# Altium PCB template.PcbDoc
Units mm, origin at the board's own origin, x right, y up, seen from the top; angles counter-clockwise.
Board outline 35.56 x 16.51 mm, 2 copper layers (Top, Bottom); 80 components, 60 nets, 282 pads, 2 vias.
Unrouted connection lines stored in the file: 142.
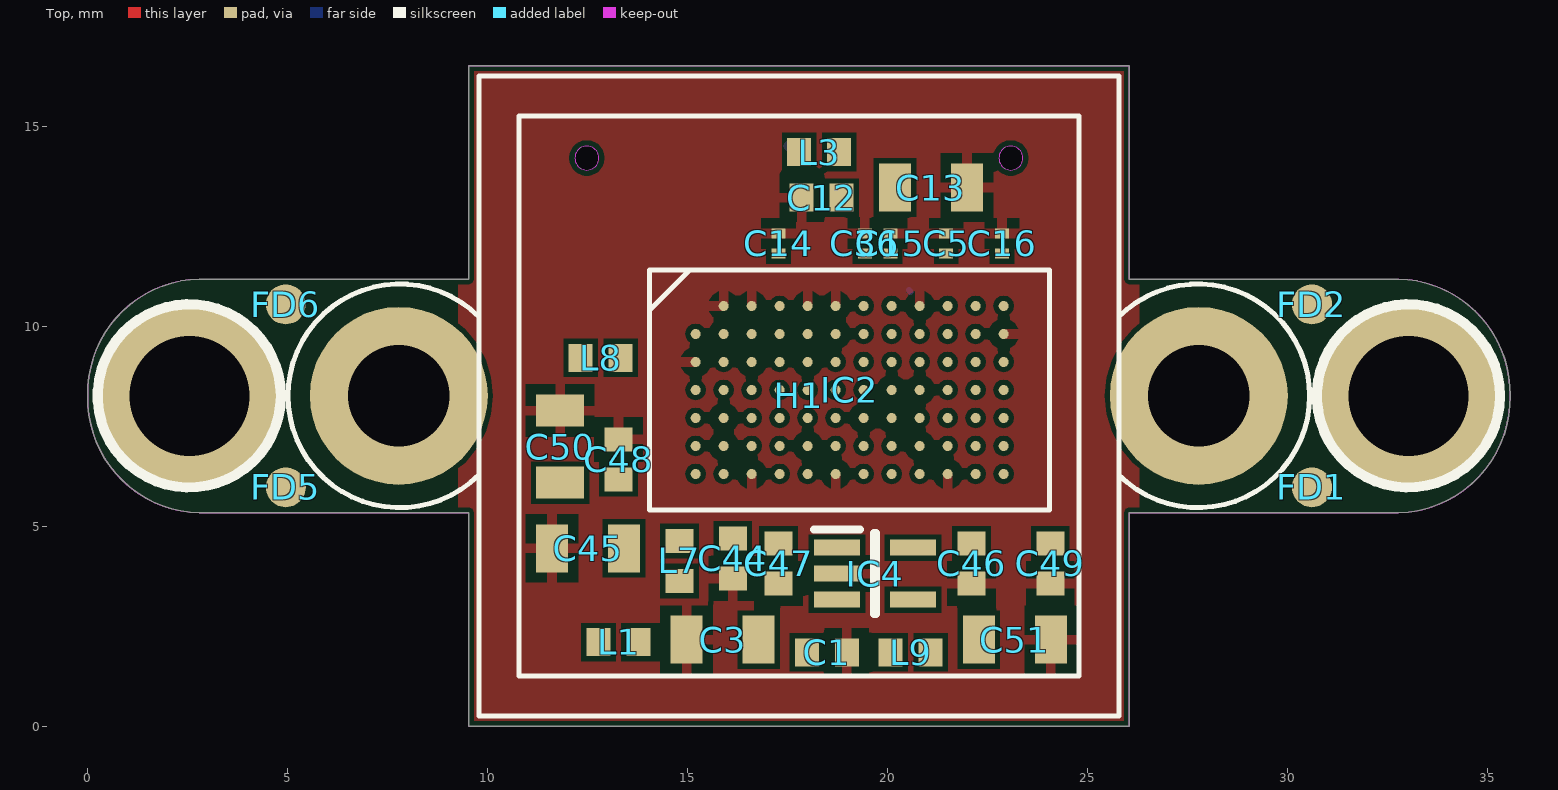
[diagram p0: Top view]
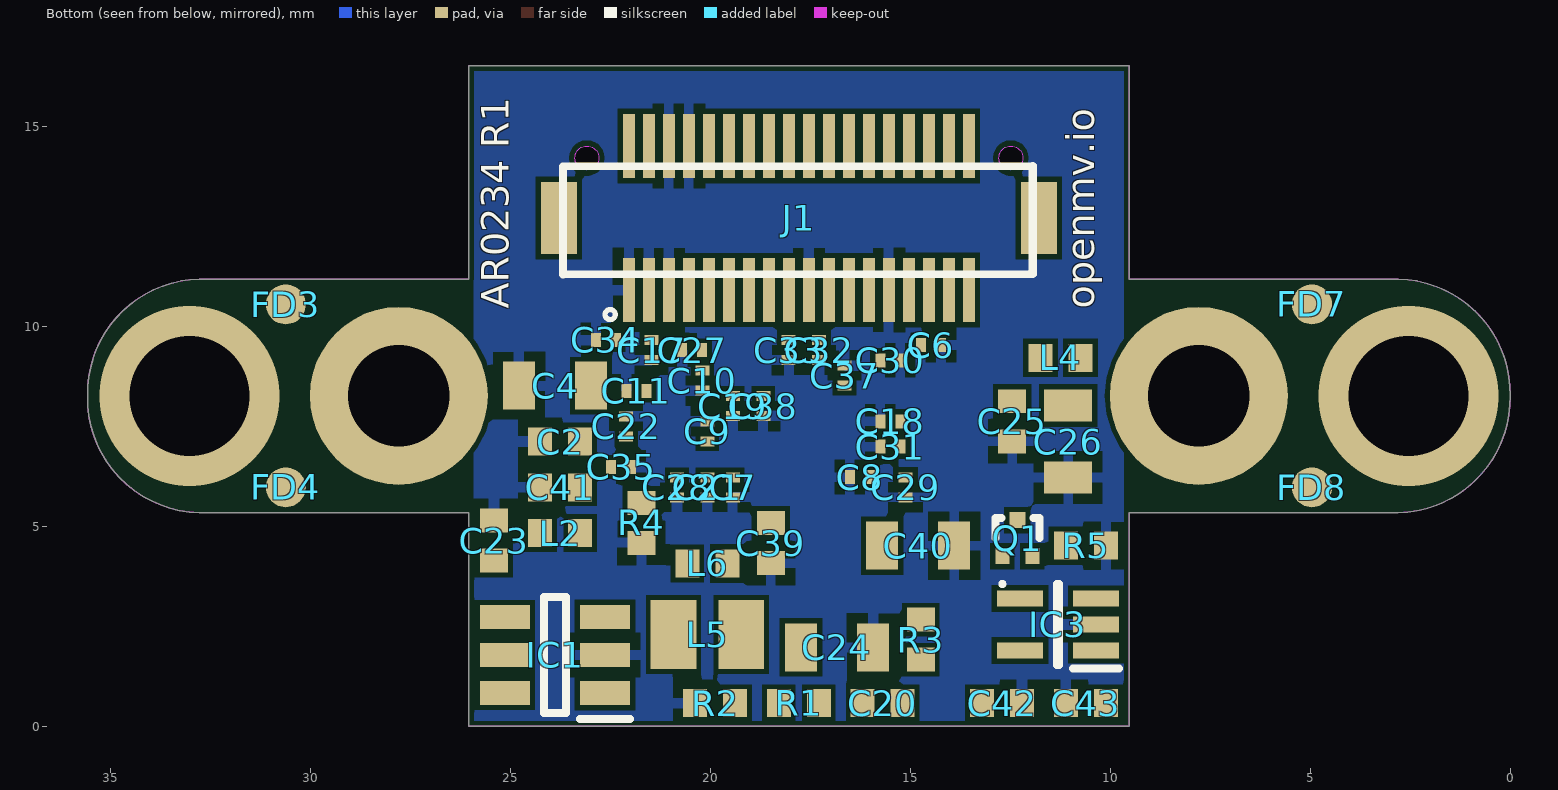
[diagram p1: Bottom view, seen from below]

## Layer stack, top to bottom
Top Solder: solder mask 0.0102, Solder Resist, Dk 3.5
Top: signal copper 0.035
Dielectric 1: dielectric 0.32, FR-4, Dk 4.8
Bottom: signal copper 0.035
Bottom Solder: solder mask 0.0102, Solder Resist, Dk 3.5

## Board outline
32.767,5.334 26.036,5.334 26.036,0 9.526,0 9.526,5.334 2.795,5.334 cw(c2.858,8.191) 0.001,8.255 cw(c2.858,8.319) 2.795,11.176 9.526,11.176 9.526,16.51 26.036,16.51 26.036,11.176 32.767,11.176 cw(c32.703,8.319) 35.561,8.255 cw(c32.703,8.191)
cut-out: 12.481,13.9 ccw(c12.481,14.2) 12.781,14.2 ccw(c12.481,14.2) 12.481,14.5 ccw(c12.481,14.2) 12.181,14.2 ccw(c12.481,14.2)
cut-out: 23.081,13.9 ccw(c23.081,14.2) 23.381,14.2 ccw(c23.081,14.2) 23.081,14.5 ccw(c23.081,14.2) 22.781,14.2 ccw(c23.081,14.2)

## Design rules (kind name [scope] priority, off if disabled: settings)
BoardOutlineClearance mdCopperDimension [All] p1: gap=0.254 ignorepadtopadclearanceinfootprint=FALSE except(0: Arc-SplitContinuation Track-SplitContinuation SMDPad-SplitContinuation THPad-SplitContinuation Via-SplitContinuation Fill-SplitContinuation Poly-SplitContinuation Region-SplitContinuation Text-SplitContinuation; 0.076: Poly-OutlineEdge Poly-CavityEdge Poly-CutoutEdge Poly-SplitBarrior)
Clearance Clearance_for_PolygonClass_Isolate_5 [InPolygonClass('Isolate_5') vs IsArc Or IsTrack Or IsPad Or IsVia Or IsFill Or IsRegion Or IsText] p1: gap=0.127 ignorepadtopadclearanceinfootprint=FALSE
Clearance "Clearance (Same Net)" [All] p2: gap=0.076 ignorepadtopadclearanceinfootprint=FALSE
Clearance Clearance_for_NetClass_signal [InNetClass('signal') vs InNetClass('signal')] p3: gap=0.127 ignorepadtopadclearanceinfootprint=FALSE
Clearance Clearance_for_NetClass_signal_And_pwr [InNetClass('signal') vs InNetClass('pwr')] p4: gap=0.076 ignorepadtopadclearanceinfootprint=FALSE
Clearance Clearance_for_NetClass_signal_And_gnd [InNetClass('signal') vs InNetClass('gnd')] p5: gap=0.076 ignorepadtopadclearanceinfootprint=FALSE
Clearance Clearance_for_NetClass_signal_And_default [InNetClass('signal') vs IsArc Or IsTrack Or IsPad Or IsVia Or IsFill Or IsRegion Or IsText] p6: gap=0.076 ignorepadtopadclearanceinfootprint=FALSE
Clearance Clearance_for_NetClass_pwr [InNetClass('pwr') vs InNetClass('pwr')] p7: gap=0.127 ignorepadtopadclearanceinfootprint=FALSE
Clearance Clearance_for_NetClass_pwr_And_gnd [InNetClass('pwr') vs InNetClass('gnd')] p8: gap=0.076 ignorepadtopadclearanceinfootprint=FALSE
Clearance Clearance_for_NetClass_pwr_And_default [InNetClass('pwr') vs IsArc Or IsTrack Or IsPad Or IsVia Or IsFill Or IsRegion Or IsText] p9: gap=0.076 ignorepadtopadclearanceinfootprint=FALSE
Clearance Clearance_for_NetClass_gnd [InNetClass('gnd') vs InNetClass('gnd')] p10: gap=0.127 ignorepadtopadclearanceinfootprint=FALSE
Clearance Clearance_for_NetClass_gnd_And_default [InNetClass('gnd') vs IsArc Or IsTrack Or IsPad Or IsVia Or IsFill Or IsRegion Or IsText] p11: gap=0.076 ignorepadtopadclearanceinfootprint=FALSE
Clearance [All] p12: gap=0.076 ignorepadtopadclearanceinfootprint=FALSE
HoleSize HoleSize_For_NetClass_signal [InNetClass('signal')] p1: absolutevalues=TRUE maxlimit=0.102 minlimit=0.102 maxpercent=80.000 minpercent=20.000
HoleSize HoleSize_For_NetClass_pwr [InNetClass('pwr')] p2: absolutevalues=TRUE maxlimit=0.102 minlimit=0.102 maxpercent=80.000 minpercent=20.000
HoleSize HoleSize_For_NetClass_gnd [InNetClass('gnd')] p3: absolutevalues=TRUE maxlimit=0.102 minlimit=0.102 maxpercent=80.000 minpercent=20.000
HoleSize [All] p4: absolutevalues=TRUE maxlimit=2540 minlimit=0.102 maxpercent=80.000 minpercent=20.000
HoleToHoleClearance mdDrill [All] p1: gap=0.076 allowstackedmicrovias=TRUE
MinimumSolderMaskSliver [All] p1 off: minsoldermaskwidth=0.254
PasteMaskExpansion Expansion_SMDPaste_OFF [InPadClass('SMDPaste_OFF')] p1: expansion=0
PasteMaskExpansion mlMinCreamFrame [All] p2: expansion=0
PolygonConnect PolygonConnect_For_PolygonThermal_ON_Width100000_Gap100000 [InPolygonClass('PolygonThermal_ON_Width100000_Gap100000') vs Not IsVia] p1: connectstyle=Relief reliefconductorwidth=0.254 reliefentries=4 polygonreliefangle="90 Angle" airgapwidth=0.254
PolygonConnect ThermalVias [IsVia] p2: connectstyle=Direct reliefconductorwidth=0.254 reliefentries=4 polygonreliefangle="90 Angle" airgapwidth=0.254
PolygonConnect [All] p3: connectstyle=Relief reliefconductorwidth=0.254 reliefentries=4 polygonreliefangle="90 Angle" airgapwidth=0.254
RoutingVias [All] p1: holewidth=0.102 width=0.254 viastyle="Through Hole" minholewidth=0.102 minwidth=0.254 maxholewidth=2.54 maxwidth=2.54
SolderMaskExpansion mlMinStopFrame [All] p1: expansion=0.051 istentingtop=FALSE
Width Width_For_NetClass_signal [InNetClass('signal')] p1: maxlimit=0.254 minlimit=0.076 preferedwidth=0.076
Width Width_For_NetClass_pwr [InNetClass('pwr')] p2: maxlimit=0.254 minlimit=0.076 preferedwidth=0.076
Width Width_For_NetClass_gnd [InNetClass('gnd')] p3: maxlimit=0.254 minlimit=0.076 preferedwidth=0.076
Width [All] p4: maxlimit=0.254 minlimit=0.076 preferedwidth=0.076
26 further rules are at their usual default settings.

## Classes and differential pairs
polygon class PolygonThermal_ON_Width100000_Gap100000: Polygon_2_Net_GND Polygon_3_Net_GND
polygon class Isolate_5: Polygon_2_Net_GND Polygon_3_Net_GND
pad class SMDPaste_OFF: FD1-1 FD2-1 FD3-1 FD4-1 FD5-1 FD6-1 FD7-1 FD8-1 J1-1 J1-2 J1-3 J1-4 J1-5 J1-6 J1-7 J1-8 J1-9 J1-10 J1-11 J1-12 J1-13 J1-14 J1-15 J1-16 J1-17 J1-18 J1-19 J1-20 J1-21 J1-22 J1-23 J1-24 J1-25 J1-26 J1-27 J1-28 J1-29 J1-30 J1-31 J1-32 J1-33 J1-34 J1-35 J1-36
net class signal: DCMI_CLK DCMI_D0 DCMI_D1 DCMI_D2 DCMI_D3 DCMI_D4 DCMI_D5 DCMI_D6 DCMI_D7 DCMI_D8 DCMI_D9 DCMI_FSIN DCMI_HSYNC DCMI_PCLK DCMI_PWDN DCMI_PWDN_INT DCMI_RST DCMI_SCL DCMI_SDA DCMI_VSYNC RESET_N SPI_MISO SPI_MOSI SPI_SCLK SPI_SSEL
net class pwr: CAP FB RSVD SW VAA VAA_PHY VAA_PIX VCC VDD VDD_DATA VDD_PHY VDD_REG VDDA VDDIO VDDIO_PHY VDDIO_PHY_REG VDDIO_REG
net class gnd: GND

## Components (designator, comment, footprint, x,y, rotation, side; value= is the part's Value field where it differs from the comment)
C1 "4.7uF" 0402 18.479,1.841 r180 top
C2 "4.7uF" 0402 23.75,7.112 r180 bottom
C3 "22uF" 0805 15.876,2.159 r0 top
C4 "22uF" 0805 23.877,8.509 r180 bottom
C5 "0.22uF" C0201 21.464,12.065 r90 top
C6 "0.22uF" C0201 14.479,9.525 r180 bottom
C7 "0.22uF" C0201 19.432,5.969 r270 bottom
C8 "0.22uF" C0201 16.257,6.223 r0 bottom
C9 "0.22uF" C0201 20.067,7.366 r90 bottom
C10 "0.22uF" C0201 20.194,8.636 r270 bottom
C11 "0.22uF" C0201 21.845,8.382 r0 bottom
C12 "4.7uF" 0402 18.352,13.208 r0 top
C13 "22uF" 0805 21.083,13.462 r180 top
C14 "0.22uF" C0201 17.273,12.065 r90 top
C15 "0.22uF" C0201 20.067,12.065 r90 top
C16 "0.22uF" C0201 22.861,12.065 r90 top
C17 "0.22uF" C0201 21.464,9.398 r270 bottom
C18 "0.22uF" C0201 15.495,7.62 r0 bottom
C19 "0.22uF" C0201 19.432,8.001 r270 bottom
C20 "6.8pF" 0402 15.685,0.572 r180 bottom
C21 "0.22uF" C0201 20.067,5.969 r270 bottom
C22 "0.22uF" C0201 22.099,7.493 r90 bottom
C23 "4.7uF" 0402 25.401,4.635 r270 bottom
C24 "22uF" 0805 16.828,1.968 r0 bottom
C25 "4.7uF" 0402 12.447,7.62 r90 bottom
C26 "22uF" 0805 11.05,7.112 r90 bottom
C27 "0.22uF" C0201 20.448,9.398 r0 bottom
C28 "0.22uF" C0201 20.829,5.969 r270 bottom
C29 "0.22uF" C0201 15.114,5.969 r270 bottom
C30 "0.22uF" C0201 15.495,9.144 r180 bottom
C31 "0.22uF" C0201 15.495,6.985 r0 bottom
C32 "0.22uF" C0201 17.273,9.398 r270 bottom
C33 "0.22uF" C0201 18.035,9.398 r270 bottom
C34 "0.22uF" C0201 22.607,9.652 r0 bottom
C35 "0.22uF" C0201 22.226,6.477 r180 bottom
C36 "0.22uF" C0201 19.432,12.065 r90 top
C37 "0.22uF" C0201 16.638,8.763 r90 bottom
C38 "0.22uF" C0201 18.67,8.001 r270 bottom
C39 "4.7uF" 0402 18.479,4.572 r90 bottom
C40 "22uF" 0805 14.796,4.508 r0 bottom
C41 "4.7uF" 0402 23.75,5.969 r180 bottom
C42 "4.7uF" 0402 12.701,0.572 r0 bottom
C43 "4.7uF" 0402 10.605,0.572 r180 bottom
C44 "4.7uF" 0402 16.13,4.191 r90 top
C45 "22uF" 0805 12.51,4.445 r0 top
C46 "4.7uF" 0402 22.099,4.064 r90 top
C47 "4.7uF" 0402 17.273,4.064 r90 top
C48 "4.7uF" 0402 13.272,6.667 r270 top
C49 "4.7uF" 0402 24.067,4.064 r90 top
C50 "22uF" 0805 11.812,6.985 r270 top
C51 "22uF" 0805 23.178,2.159 r180 top
FD1 "" FIDUCIAL-1X2 30.608,5.969 r0 top
FD2 "" FIDUCIAL-1X2 30.608,10.541 r0 top
FD3 "" FIDUCIAL-1X2 30.608,10.541 r180 bottom
FD4 "" FIDUCIAL-1X2 30.608,5.969 r180 bottom
FD5 "" FIDUCIAL-1X2 4.954,5.969 r0 top
FD6 "" FIDUCIAL-1X2 4.954,10.541 r0 top
FD7 "" FIDUCIAL-1X2 4.954,10.541 r180 bottom
FD8 "" FIDUCIAL-1X2 4.954,5.969 r180 bottom
H1 "" LENSMOUNT-20MM 17.781,8.255 r0 top
IC1 "TLV62568PDDCR" SOT95P280X110-6N 23.877,1.778 r0 bottom
IC2 "AR0234CSSC00SUKA0" AR0234CSSC00SUKA0 19.052,8.403 r0 top
IC3 "MIC5365-2.8YC5-TR" SOT65P210X110-5N 11.304,2.54 r0 bottom
IC4 "MIC5365-2.8YC5-TR" SOT65P210X110-5N 19.686,3.81 r0 top
J1 "" DF12-36-DP 17.781,12.7 r180 bottom
L1 "100" 0402 13.272,2.095 r180 top
L2 "100" 0402 23.75,4.826 r0 bottom
L3 "100" 0402 18.289,14.351 r180 top
L4 "100" 0402 11.24,9.207 r0 bottom
L5 "MAKK2016T2R2M" INDC2016X100N 20.067,2.286 r0 bottom
L6 "100" 0402 20.067,4.064 r0 bottom
L7 "100" 0402 14.796,4.127 r270 top
L8 "100" 0402 12.828,9.207 r180 top
L9 "100" 0402 20.575,1.841 r180 top
Q1 "PMXB120EPEZ" PMXB120EPEZ 12.32,4.699 r180 bottom
R1 "100K" R0402 17.781,0.572 r180 bottom
R2 "100K" R0402 19.876,0.572 r0 bottom
R3 "10K" R0402 14.733,2.159 r90 bottom
R4 "1.5K" R0402 21.718,5.08 r90 bottom
R5 "100K" R0402 10.605,4.508 r180 bottom

## Footprints (in the part's own frame and the unit in brackets; to place one, negate y for a bottom-side part, rotate by r counter-clockwise, add the part's x,y. Pads: shape width x height; smd on the part's side, far side on the other; paste and mask are expansions set on the pad)
0402 [mm] "0402"
  rect 0.6x0.7 smd: 1(-0.5,0) 2(0.5,0)
0805 [mil] "0805"
  rect 31.5x47.24 smd: 1(-35.43,0) 2(35.43,0)
AR0234CSSC00SUKA0 [mm] "AR0234CSSC00SUKA0"
  rrect100% 0.25x0.25 smd: P$1(-3.15,2.1) P$2(-2.45,2.1) P$3(-1.75,2.1) P$4(-1.05,2.1) P$5(-0.35,2.1) P$6(0.35,2.1) P$7(1.05,2.1) P$8(1.75,2.1) P$9(2.45,2.1) P$10(3.15,2.1) P$11(3.85,2.1) P$12(-3.85,1.4) P$13(-3.15,1.4) P$14(-2.45,1.4) P$15(-1.75,1.4) P$16(-1.05,1.4) P$17(-0.35,1.4) P$18(0.35,1.4) P$19(1.05,1.4) P$20(1.75,1.4) P$21(2.45,1.4) P$22(3.15,1.4) P$23(3.85,1.4) P$24(-3.85,0.7) P$25(-3.15,0.7) P$26(-2.45,0.7) P$27(-1.75,0.7) P$28(-1.05,0.7) P$29(-0.35,0.7) P$30(0.35,0.7) P$31(1.05,0.7) P$32(1.75,0.7) P$33(2.45,0.7) P$34(3.15,0.7) P$35(3.85,0.7) P$36(-3.85,0) P$37(-3.15,0) P$38(-2.45,0) P$39(-1.75,0) P$40(-1.05,0) P$41(-0.35,0) P$42(0.35,0) P$43(1.05,0) P$44(1.75,0) P$45(2.45,0) P$46(3.15,0) P$47(3.85,0) P$48(-3.85,-0.7) P$49(-3.15,-0.7) P$50(-2.45,-0.7) P$51(-1.75,-0.7) P$52(-1.05,-0.7) P$53(-0.35,-0.7) P$54(0.35,-0.7) P$55(1.05,-0.7) P$56(1.75,-0.7) P$57(2.45,-0.7) P$58(3.15,-0.7) P$59(3.85,-0.7) P$60(-3.85,-1.4) P$61(-3.15,-1.4) P$62(-2.45,-1.4) P$63(-1.75,-1.4) P$64(-1.05,-1.4) P$65(-0.35,-1.4) P$66(0.35,-1.4) P$67(1.05,-1.4) P$68(1.75,-1.4) P$69(2.45,-1.4) P$70(3.15,-1.4) P$71(3.85,-1.4) P$72(-3.85,-2.1) P$73(-3.15,-2.1) P$74(-2.45,-2.1) P$75(-1.75,-2.1) P$76(-1.05,-2.1) P$77(-0.35,-2.1) P$78(0.35,-2.1) P$79(1.05,-2.1) P$80(1.75,-2.1) P$81(2.45,-2.1) P$82(3.15,-2.1) P$83(3.85,-2.1)
  silkscreen extent -5,-3 5,3
C0201 [mm] "C0201"
  rect 0.25x0.35 smd: 1(-0.25,0) 2(0.25,0)
DF12-36-DP [mm] "DF12-36-DP"
  rect 0.3x1.6 smd paste+0: 1(-4.25,-1.8) 2(-4.25,1.8) 3(-3.75,-1.8) 4(-3.75,1.8) 5(-3.25,-1.8) 6(-3.25,1.8) 7(-2.75,-1.8) 8(-2.75,1.8) 9(-2.25,-1.8) 10(-2.25,1.8) 11(-1.75,-1.8) 12(-1.75,1.8) 13(-1.25,-1.8) 14(-1.25,1.8) 15(-0.75,-1.8) 16(-0.75,1.8) 17(-0.25,-1.8) 18(-0.25,1.8) 19(0.25,-1.8) 20(0.25,1.8) 21(0.75,-1.8) 22(0.75,1.8) 23(1.25,-1.8) 24(1.25,1.8) 25(1.75,-1.8) 26(1.75,1.8) 27(2.25,-1.8) 28(2.25,1.8) 29(2.75,-1.8) 30(2.75,1.8) 31(3.25,-1.8) 32(3.25,1.8) 33(3.75,-1.8) 34(3.75,1.8) 35(4.25,-1.8) 36(4.25,1.8)
  rect 0.9x1.8 smd: F1(-6,0) F2(6,0)
  silkscreen extent -5.89,-2.54 5.85,1.3
FIDUCIAL-1X2 [mm] "FIDUCIAL-1X2"
  rrect100% 1x1 smd paste+0: 1(0,0)
INDC2016X100N [mm] "INDC2016X100N"
  rect 1.14x1.73 smd: 1(-0.847,0) 2(0.847,0)
LENSMOUNT-20MM [mm] "LENSMOUNT-20MM"
  round 4.445 hole 2.54: P$1(-10,0) P$2(10,0)
  silkscreen extent -12.77,-8 12.77,8
PMXB120EPEZ [mm] "PMXB120EPEZ"
  rect 0.35x0.4 smd: 1(-0.375,-0.45) 2(0.375,-0.45)
  rect 0.4x0.4 smd: 3(0,0.45)
  silkscreen extent -0.55,-1.2 0.55,0.5
R0402 [mm] "R0402"
  rect 0.6x0.7 smd: 1(-0.5,0) 2(0.5,0)
SOT65P210X110-5N [mm] "SOT65P210X110-5N"
  rect 1.15x0.4 smd: 1(-0.95,0.65) 2(-0.95,0) 3(-0.95,-0.65) 4(0.95,-0.65) 5(0.95,0.65)
  silkscreen extent -1.53,-1.01 0.02,1.1
SOT95P280X110-6N [mm] "SOT95P280X110-6N"
  rect 1.25x0.6 smd: 1(-1.25,0.95) 2(-1.25,0) 3(-1.25,-0.95) 4(1.25,-0.95) 5(1.25,0) 6(1.25,0.95)
  silkscreen extent -1.88,-1.45 0.28,1.6

## Part data
C1 C2 C12 C20 C23 C25 C39 C41 C42 C43 C44 C46 C47 C48 C49 L1 L2 L3 L4 L6 L7 L8 L9: library part 0402, PackageName=0402
C3 C4 C13 C24 C26 C40 C45 C50 C51: library part 0805, PackageName=0805
C5 C6 C7 C8 C9 C10 C11 C14 C15 C16 C17 C18 C19 C21 C22 C27 C28 C29 C30 C31 C32 C33 C34 C35 C36 C37 C38: library part C0201, PackageName=C0201
FD1 FD2 FD3 FD4 FD5 FD6 FD7 FD8: library part FIDUCIAL-1X2, PackageName=FIDUCIAL-1X2
H1: library part LENSMOUNT-20MM, PackageName=LENSMOUNT-20MM
IC1: library part SOT95P280X110-6N, PackageName=SOT95P280X110-6N
IC3 IC4: library part SOT65P210X110-5N, PackageName=SOT65P210X110-5N
J1: library part DF12-36-DP, PackageName=DF12-36-DP
L5: library part INDC2016X100N, PackageName=INDC2016X100N
R1 R2 R3 R4 R5: library part R0402, PackageName=R0402
IC2: PackageName=AR0234CSSC00SUKA0
Q1: PackageName=PMXB120EPEZ

## Free pads (board coordinates)
  round 0.6 hole 0.6 unplated: MH1(23.081,14.2) MH2(12.481,14.2)

## Via types
v1: diameter 4.5/4.5 (per signal layer), hole 3, Top to Bottom, 2 vias

## Nets (pads, with @x,y where several pads share a name; then routed paths per layer and width w, separated by ;. In a path a pad name is that pad's centre, name@x,y a point inside that pad or via, vN(x,y) a via of type N, cw(c..) or ccw(c..) an arc to the next point about the centre after c; other vN are vias at no path point)
CAP: C41.2 IC2.P$71
DCMI_CLK: IC2.P$82 J1.12
DCMI_D0: IC2.P$62 J1.9
DCMI_D1: IC2.P$75 J1.7 | length 0.1
  Bottom w0.152: J1.7 J1.7@20.575,10.856
DCMI_D2: IC2.P$76 J1.31
DCMI_D3: IC2.P$50 J1.29
DCMI_D4: IC2.P$36 J1.35
DCMI_D5: IC2.P$37 J1.28
DCMI_D6: IC2.P$14 J1.26
DCMI_D7: IC2.P$51 J1.33
DCMI_D8: IC2.P$39 J1.24
DCMI_D9: IC2.P$27 J1.22
DCMI_FSIN: IC2.P$40 J1.23
DCMI_HSYNC: IC2.P$30 J1.18
DCMI_PCLK: IC2.P$29 J1.14
DCMI_PWDN: J1.25 Q1.1
DCMI_PWDN_INT: IC3.3 Q1.3 R5.1
DCMI_RST: J1.21 R3.2
DCMI_SCL: IC2.P$65 J1.32
DCMI_SDA: IC2.P$53 J1.34
DCMI_VSYNC: IC2.P$18 J1.16
FB: C20.2 IC1.6 R1.1 R2.1
GND: C1.1 C2.1 C3.1 C4.1 C5.2 C6.2 C7.2 C8.2 C9.2 C10.2 C11.2 C12.1 C13.1 C14.2 C15.2 C16.2 C17.2 C18.2 C19.2 C21.2 C22.2 C23.1 C24.1 C25.1 C26.1 C27.2 C28.2 C29.2 C30.2 C31.2 C32.2 C33.2 C34.2 C35.2 C36.2 C37.2 C38.2 C39.1 C40.1 C41.1 C42.1 C43.1 C44.1 C45.1 C46.1 C47.1 C48.1 C49.1 C50.1 C51.1 IC1.2 IC2.P$1 IC2.P$2 IC2.P$4 IC2.P$5 IC2.P$8 IC2.P$13 IC2.P$17 IC2.P$23 IC2.P$24 IC2.P$26 IC2.P$28 IC2.P$43 IC2.P$44 IC2.P$49 IC2.P$54 IC2.P$55 IC2.P$61 IC2.P$64 IC2.P$68 IC2.P$74 IC2.P$77 IC2.P$81 IC3.2 IC4.2 J1.1 J1.3 J1.5 J1.6 J1.8 J1.19 J1.27 R2.2 R4.1 R5.2
N$3: 
  other v1: 2.541,8.255
N$4: 
  other v1: 33.021,8.255
N$57: 
N$64: 
N$65: 
N$66: 
N$67: 
N$68: 
N$69: 
N$70: 
N$71: 
N$72: 
N$73: 
N$74: 
N$75: 
N$76: 
N$77: 
RESET_N: IC1.5 IC2.P$66 R3.1
RSVD: IC2.P$69 R4.2
SPI_MISO: IC2.P$52 J1.15
SPI_MOSI: J1.17
SPI_SCLK: J1.13
SPI_SSEL: J1.11
SW: IC1.3 L5.2
VAA: C5.1 C6.1 C7.1 C8.1 C44.2 C45.2 IC2.P$9 IC2.P$12 IC2.P$73 IC2.P$78 L7.1
VAA_PHY: C9.1 C39.2 C40.2 IC2.P$67 L6.1
VAA_PIX: C27.1 C28.1 C29.1 C30.1 C48.2 C50.2 IC2.P$19 IC2.P$25 IC2.P$72 IC2.P$80 L8.1
VCC: C23.2 IC1.4 J1.2 J1.10 J1.20 J1.30 J1.36 | length 0
  Bottom w0.254: J1.20@17.527,14.504 J1.20
VDD: C1.2 C3.2 C14.1 C15.1 C16.1 C17.1 C18.1 C19.1 C21.1 IC2.P$3 IC2.P$7 IC2.P$11 IC2.P$21 IC2.P$42 IC2.P$48 IC2.P$79 L1.1
VDD_DATA: C2.2 C4.2 C22.1 IC2.P$70 L2.1
VDD_PHY: C10.1 C12.2 C13.2 IC2.P$31 L3.1
VDD_REG: C20.1 C24.2 L1.2 L2.2 L3.2 L5.1 R1.2
VDDA: C43.2 C47.2 IC3.1 IC4.1 J1.4 Q1.2
VDDIO: C31.1 C32.1 C33.1 C34.1 C35.1 C36.1 C37.1 C38.1 C49.2 C51.2 IC2.P$6 IC2.P$15 IC2.P$16 IC2.P$22 IC2.P$38 IC2.P$41 IC2.P$60 IC2.P$83 L9.1
VDDIO_PHY: C11.1 C25.2 C26.2 IC2.P$45 L4.1
VDDIO_PHY_REG: C46.2 IC1.1 IC4.5 L4.2
VDDIO_REG: C42.2 IC3.5 IC4.3 L6.2 L7.2 L8.2 L9.2
pads on no net: FD1.1 FD2.1 FD3.1 FD4.1 FD5.1 FD6.1 FD7.1 FD8.1 H1.P$1 H1.P$2 IC2.P$10 IC2.P$20 IC2.P$32 IC2.P$33 IC2.P$34 IC2.P$35 IC2.P$46 IC2.P$47 IC2.P$56 IC2.P$57 IC2.P$58 IC2.P$59 IC2.P$63 IC3.4 IC4.4 J1.F1 J1.F2

## Polygon pours and split planes (outlines as drawn)
GND on Top "Polygon_2_Net_GND" (solid, remove dead copper, pour order 1): 9.272,-0.254 9.272,16.764 26.29,16.764 26.29,-0.254
GND on Bottom "Polygon_3_Net_GND" (solid, remove dead copper, pour order 0): 9.653,0.127 9.653,16.383 25.909,16.383 25.909,0.127

## Keep-outs
Keep-Out Layer:
  the board outline again, w0

## Silkscreen, mask and mechanical layers (free items; w line width, h text height)
Top Overlay:
  circle w0.254: c2.541,8.255 r2.29
  circle w0.254: c33.021,8.255 r2.29
Bottom Overlay:
  text "openmv.io" at 10.399,10.437 h0.69 r270
  text "AR0234 R1" at 25.028,10.437 h0.69 r270